# Altium PCB Flashing_Board_PcbDoc.PcbDoc
Units mm, origin at the board's own origin, x right, y up, seen from the top; angles counter-clockwise.
Board outline 72 x 31 mm, 2 copper layers (Top Layer, Bottom Layer); 24 components, 21 nets, 105 pads, 16 vias.
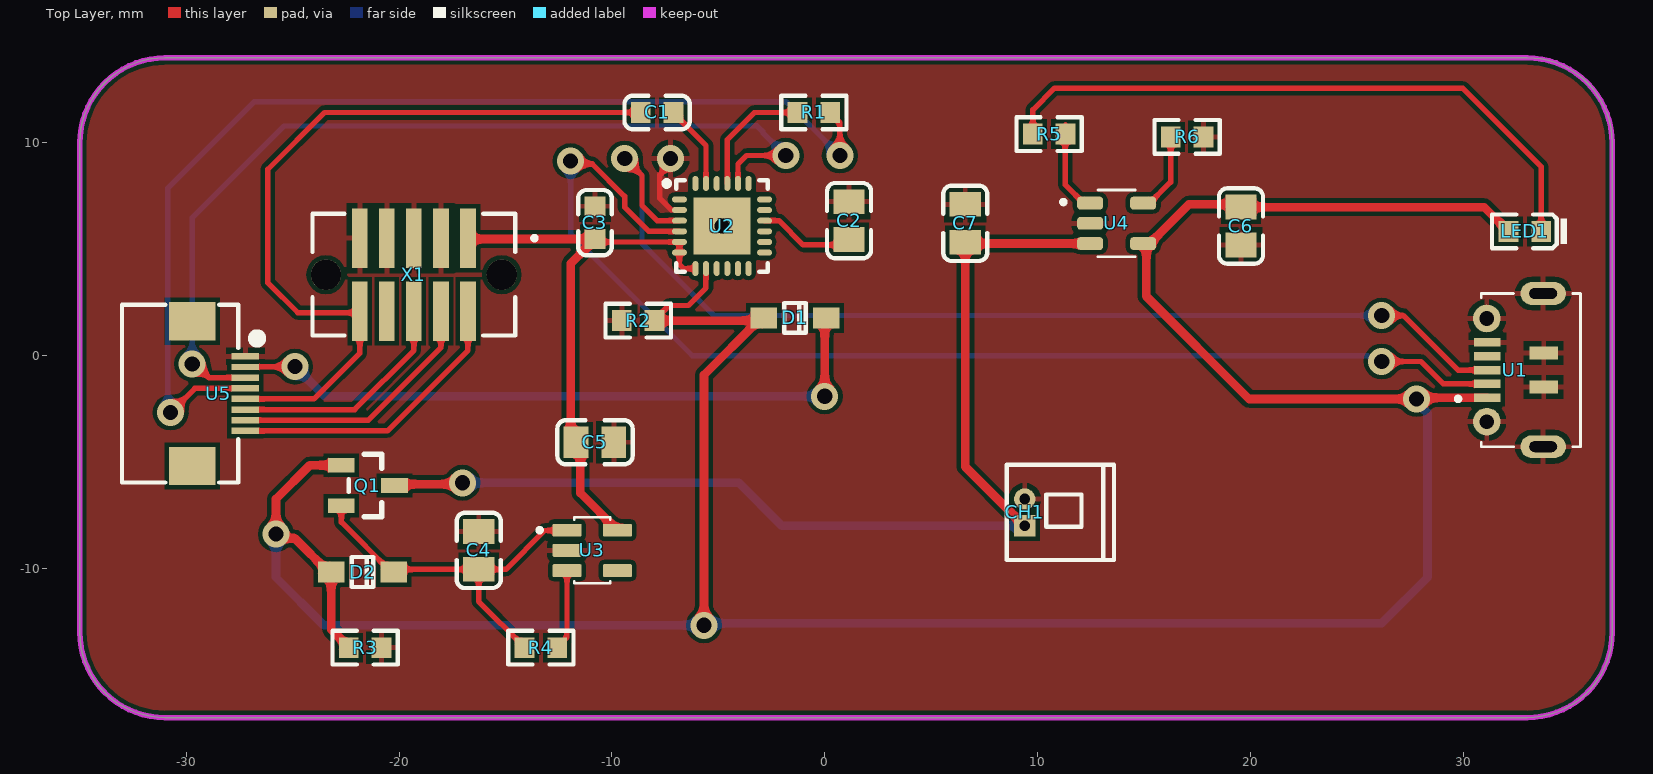
[diagram p0: Top Layer view]
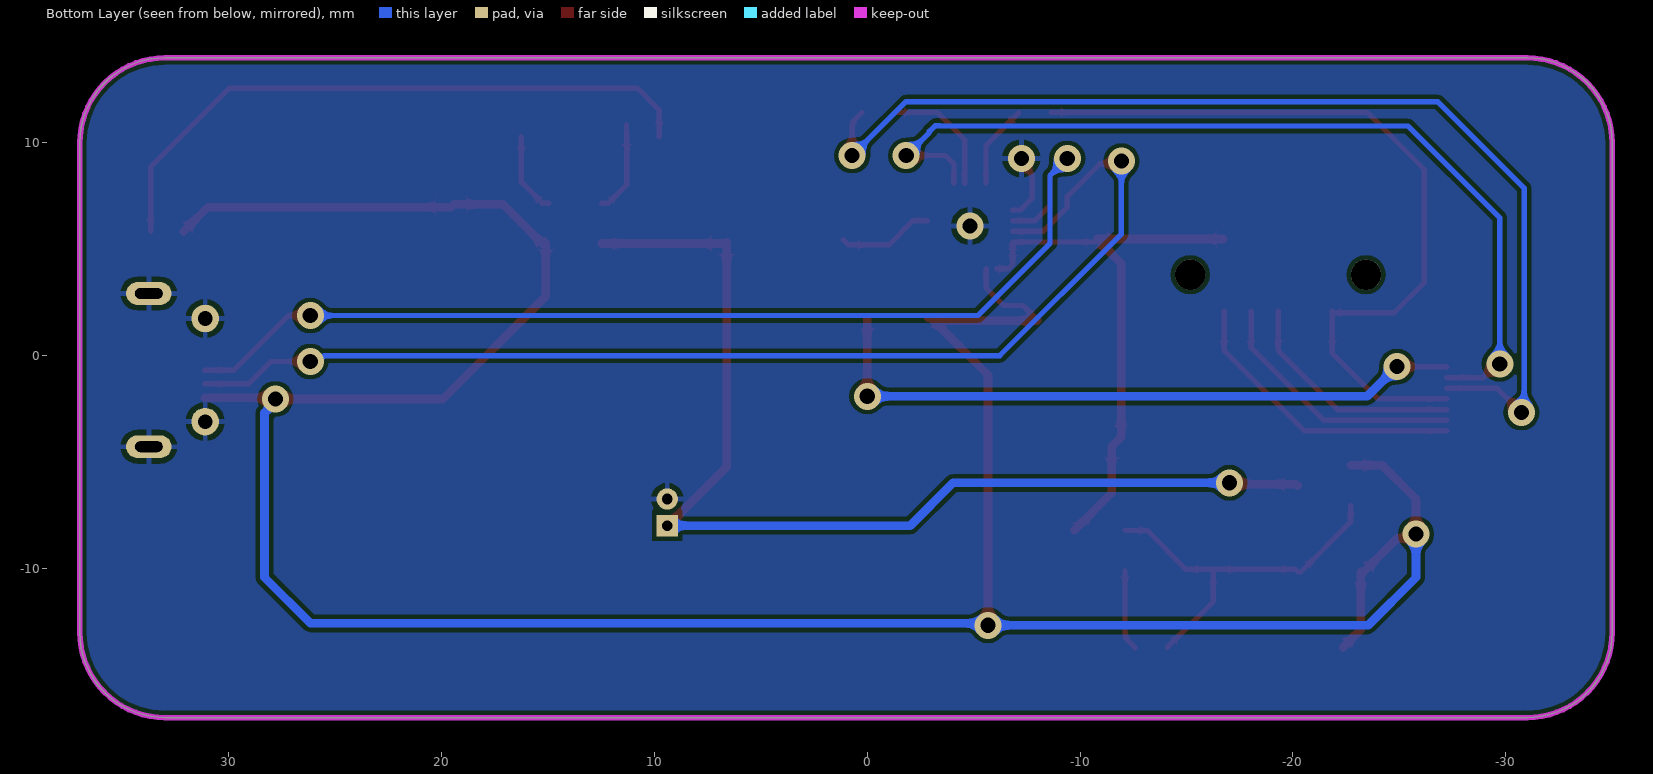
[diagram p1: Bottom Layer view, seen from below]
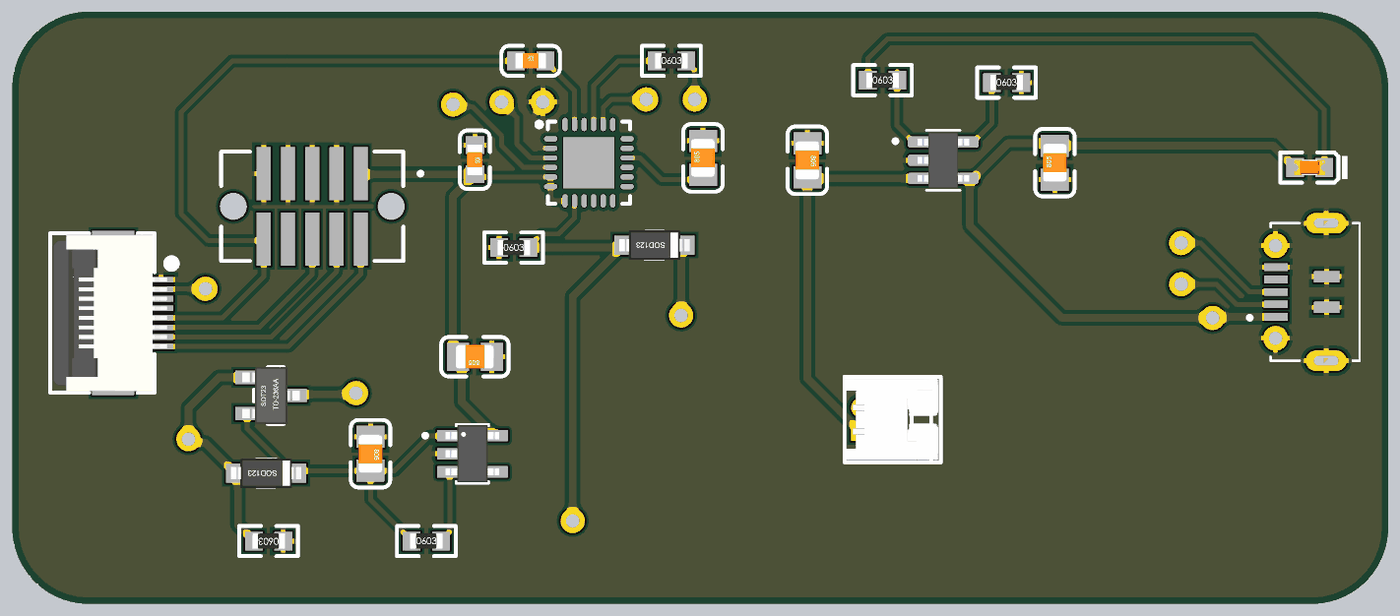
[diagram p2: 3D render of the assembled board from above, using the file's embedded part models]

## Layer stack, top to bottom
Top Solder: solder mask 0.0102, Solder Resist, Dk 3.5
Top Layer: signal copper 0.0356
Dielectric 1: dielectric 0.32, FR-4, Dk 4.8
Bottom Layer: signal copper 0.0356
Bottom Solder: solder mask 0.0102, Solder Resist, Dk 3.5

## Board outline
-35,-13 -35,10 cw(c-31,10) -31,14 33,14 cw(c33,10) 37,10 37,-13 cw(c33,-13) 33,-17 -31,-17 cw(c-31,-13)

## Design rules (kind name [scope] priority, off if disabled: settings)
Clearance [All] p1: gap=0.2 ignorepadtopadclearanceinfootprint=FALSE
ComponentClearance [All] p1: gap=0 collisioncheckmode=3 verticalgap=0 showdistances=FALSE
PolygonConnect [All] p1: connectstyle=Relief reliefconductorwidth=0.254 reliefentries=4 polygonreliefangle="90 Angle" airgapwidth=0.254
RoutingVias [All] p1: holewidth=0.711 width=1.27 viastyle="Through Hole" minholewidth=0 minwidth=0 maxholewidth=0.711 maxwidth=1.27
SolderMaskExpansion [All] p1: expansion=0.102 istentingtop=FALSE
Width [All] p1: maxlimit=0.406 minlimit=0.254 preferedwidth=0.254
29 further rules are at their usual default settings.

## Components (designator, comment, footprint, x,y, rotation, side; value= is the part's Value field where it differs from the comment)
C1 "0.1uF" 0603_C -7.874,11.43 r0 top
C2 "10uF" 0805_C 1.143,6.349 r90 top
C3 "0.1uF" 0603_C -10.795,6.253 r270 top
C4 "10uF" 0805_C -16.256,-9.144 r270 top
C5 "10uF" 0805_C -10.795,-4.064 r180 top
C6 "10uF" 0805_C 19.558,6.096 r90 top
C7 "10uF" 0805_C 6.604,6.223 r270 top
CH1 "BAT PIN" "BAT_MX 1.25-WI-2P" 9.398,-7.356 r90 top
D1 "LMBR120FT1G" SOD-123 -1.397,1.778 r180 top
D2 "LMBR120FT1G" SOD-123 -21.717,-10.16 r180 top
LED1 "ORANGE" 0603_LED_S1 32.893,5.842 r180 top
Q1 "SI2301CDS-T1-GE3" SOT-23(SOT-23-3) -21.463,-6.096 r180 top
R1 "1KΩ" 0603_R -0.508,11.43 r0 top
R2 "100KΩ" 0603_R -8.763,1.651 r0 top
R3 "100KΩ" 0603_R -21.59,-13.716 r180 top
R4 "100KΩ" 0603_R -13.335,-13.716 r0 top
R5 "1KΩ" 0603_R 10.541,10.414 r0 top
R6 "1KΩ" 0603_R 17.026,10.287 r0 top
U1 "MICROXNJ" SHOUHAN_MICROXNJ 32.444,-0.673 r270 top
U2 "CP2104-F03-GM" QFN-24_4x4x05P -4.826,6.096 r270 top
U3 "AP2112K-3.3TRG1" SOT95P285X140-5N -10.922,-9.144 r0 top
U4 "MCP73831T-2ATI/OT" SOT95P280X145-5N 13.716,6.223 r0 top
U5 "FPC_8PIN" "FPC0.5 2H-WS-8P" -29.718,-1.778 r270 top
X1 "4u20317" TFM-105-12-S-D-A -19.304,3.81 r180 top

## Footprints (in the part's own frame and the unit in brackets; to place one, negate y for a bottom-side part, rotate by r counter-clockwise, add the part's x,y. Pads: shape width x height; smd on the part's side, far side on the other; paste and mask are expansions set on the pad)
0603_C [mm]
  rect 0.93x0.98 smd: 1(-0.77,0) 2(0.77,0)
  silkscreen extent -1.53,-0.79 1.54,0.79, body extent -0.8,-0.4 0.8,0.4, height 0.3
0603_LED_S1 [mm]
  rect 0.93x0.98 smd: A(0.77,0) K(-0.77,0)
  silkscreen extent -1.98,-0.79 1.54,0.79, body extent -0.8,-0.4 0.8,0.4, height 0.6
0603_R [mm]
  rect 0.93x0.98 smd: 1(-0.77,0) 2(0.77,0)
  silkscreen extent -1.53,-0.79 1.54,0.79, body extent -0.85,-0.4 0.85,0.4, height 0.56
0805_C [mm]
  rect 1.16x1.47 smd: 1(-0.89,0) 2(0.89,0)
  silkscreen extent -1.77,-1.04 1.77,1.04, body extent -1,-0.62 1,0.63, height 0.77
"BAT_MX 1.25-WI-2P" [mm] "长：4.25mm，宽：1.8mm，高：3.3mm"
  rect 1x1 hole 0.5: 1(-0.625,0)
  round 1 hole 0.5: 2(0.625,0)
  silkscreen extent -2.24,-4.19 2.24,0.85, body extent -2.12,-4.05 2.13,0.85, height 3.35
"FPC0.5 2H-WS-8P" [mm] "长：8.2mm，宽：5.2mm，高：2mm 淘宝ID:黄晶宝石   店铺网址:https://shop463601444.taobao.com"
  rect 1.8x2.2 smd: 0(-3.4,0) 0(3.4,0)
  rect 0.3x1.3 smd: 1(-1.75,2.497) 2(-1.25,2.497) 3(-0.75,2.497) 4(-0.25,2.497) 5(0.25,2.497) 6(0.75,2.497) 7(1.25,2.497) 8(1.75,2.497)
  silkscreen extent -4.17,-3.3 4.17,3.23, body extent -4.1,-3.15 4.1,2.85, height 2
QFN-24_4x4x05P [mm]
  rect 2.68x2.68 smd mask+0.051: 0(0,0)
  oval 0.28x0.7 smd mask+0.051: 1(-1.25,-2) 2(-0.75,-2) 3(-0.25,-2) 4(0.25,-2) 5(0.75,-2) 6(1.25,-2) 13(1.25,2) 14(0.75,2) 15(0.25,2) 16(-0.25,2) 17(-0.75,2) 18(-1.25,2)
  oval 0.7x0.28 smd mask+0.051: 7(2,-1.25) 8(2,-0.75) 9(2,-0.25) 10(2,0.25) 11(2,0.75) 12(2,1.25) 19(-2,1.25) 20(-2,0.75) 21(-2,0.25) 22(-2,-0.25) 23(-2,-0.75) 24(-2,-1.25)
  silkscreen extent -2.15,-2.72 2.15,2.15
SHOUHAN_MICROXNJ [mm]
  rect 0.4x1.25 smd: 1(1.3,-1.312) 2(0.65,-1.312) 3(0,-1.312) 4(-0.65,-1.312) 5(-1.3,-1.312)
  rect 0.6x1.35 smd: S1(-0.8,1.338) S2(0.8,1.338)
  oval 1.07x2.14 hole 0.5 slot 1.3 at 90 deg: S3(-3.6,1.313) S6(3.6,1.313)
  round 1.3 hole 0.7: S4(-2.425,-1.337) S5(2.425,-1.337)
  silkscreen extent -3.6,-2.79 3.6,3.06
SOD-123 [mm]
  rect 1.25x1 smd: 1(1.475,0) 2(-1.475,0)
  silkscreen extent -0.5,-0.7 0.5,0.7, body extent -1.85,-0.77 1.85,0.78, height 1.35
SOT95P280X145-5N [mm]
  rrect50% 1.22x0.6 smd: 1(-1.245,0.95) 2(-1.245,0) 3(-1.245,-0.95) 4(1.245,-0.95) 5(1.245,0.95)
  silkscreen extent -2.6,-1.57 0.88,1.57, body extent -1.35,-1.45 1.35,1.45, height 1.45
SOT95P285X140-5N [mm]
  rrect15% 1.35x0.6 smd: 1(-1.185,0.95) 2(-1.185,0) 3(-1.185,-0.95) 4(1.185,-0.95) 5(1.185,0.95)
  silkscreen extent -2.57,-1.55 0.85,1.55, body extent -1.4,-1.5 1.4,1.5, height 1.4
SOT-23(SOT-23-3) [mm]
  rect 1.25x0.7 smd: 1(1.25,-0.95) 2(1.25,0.95) 3(-1.25,0)
  silkscreen extent -0.65,-1.46 0.9,1.46, body extent -1.5,-1.5 1.5,1.5, height 1.3
TFM-105-12-S-D-A [mm]
  rect 0.74x2.79 smd: 01(-2.54,-1.715) 02(-2.54,1.715) 03(-1.27,-1.715) 04(-1.27,1.715) 05(0,-1.715) 06(0,1.715) 07(1.27,-1.715) 08(1.27,1.715) 09(2.54,-1.715) 10(2.54,1.715)
  round 1.42 hole 1.42 unplated: ""(-4.13,0) ""(4.13,0)
  silkscreen extent -5.76,-2.86 4.76,2.86

## Part data
C1 C3: library part CAP_0.1uF, "capacitance"
C2 C4 C5 C6 C7: library part CAP_10uF, "capacitance", Package=0805, SuppliersPartNumber=C15850, ComponentLink1Description=供应商链接, ComponentLink1URL=http://www.szlcsc.com/product/details_16532.html, Supplier=LC
CH1: library part BAT, "button cell battary holder BS-08-B2AA025"
D1 D2: library part DIO_5, "schottky diode", Package=SOD-123, SuppliersPartNumber=C8598, ComponentLink1Description=供应商链接, ComponentLink1URL=http://www.szlcsc.com/product/details_9093.html, Supplier=LC
LED1: library part LED_ORANGE, "LED", Package=0603, SuppliersPartNumber=C2286, ComponentLink1Description=供应商链接, ComponentLink1URL=http://www.szlcsc.com/product/details_2659.html, Supplier=LC
Q1: library part MOS, "field effect tube", Package=SOT-23(SOT-23-3), SuppliersPartNumber=C10487, ComponentLink1Description=供应商链接, ComponentLink1URL=http://www.szlcsc.com/product/details_11030.html, Supplier=LC
R1 R5 R6: library part RES_1KΩ, "resistance", Package=0603, SuppliersPartNumber=C25819, ComponentLink1Description=供应商链接, ComponentLink1URL=http://www.szlcsc.com/product/details_26562.html, Supplier=LC
R2 R3 R4: library part RES_100KΩ, "resistance", Package=0603, SuppliersPartNumber=C25819, ComponentLink1Description=供应商链接, ComponentLink1URL=http://www.szlcsc.com/product/details_26562.html, Supplier=LC
U1: "Micro USB"
U2: library part CP2104, "USB chip", Package=QFN-24_4x4x05P, SuppliersPartNumber=C47742, ComponentLink1Description=供应商链接, ComponentLink1URL=http://www.szlcsc.com/product/details_48747.html, Supplier=LC
U3: library part AP2112K, "LDO_ low dropout linear regulator"
U4: library part MCP73831T, "Battery power management chip"
X1: library part JTAG-CORTEXBOXPOSTS, "Serial Wire (SW-DP) Connector"

## Via types
v1: diameter 1.27, hole 0.711, Top Layer to Bottom Layer, 16 vias

## Nets (pads, with @x,y where several pads share a name; then routed paths per layer and width w, separated by ;. In a path a pad name is that pad's centre, name@x,y a point inside that pad or via, vN(x,y) a via of type N, cw(c..) or ccw(c..) an arc to the next point about the centre after c; other vN are vias at no path point)
3V3: C3.2 C5.2 U2.5 U2.6 U2.7 U3.5 X1.01 | length 27
  Top Layer w0.254: X1.01 X1.01@-16.722,5.483 ; C3.2@-10.82,5.483 C3.2 ; C3.2@-10.808,5.47 -10.683,5.346 U2.5 U2.6 -6.826,4.286 -6.636,4.096 U2.7
  Top Layer w0.406: X1.01@-16.722,5.483 -10.82,5.483 -11.158,5.145 -11.158,5.12 -11.938,4.34 -11.938,-3.811 C5.2 -11.479,-4.27 -11.479,-6.452 U3.5
D+: U1.3 U2.3 | length 51.1
  Top Layer w0.254: v1(-9.398,9.271) -9.388,9.271 -8.585,8.468 -8.585,7.061 -7.875,6.351 -6.831,6.351 U2.3 ; v1(26.169,1.89) 27.193,1.89 29.756,-0.673 U1.3
  Bottom Layer w0.254: v1(-9.398,9.271) -9.388,9.271 -8.585,8.468 -8.585,5.283 -5.192,1.89 v1(26.169,1.89)
D-: U1.2 U2.4 | length 56.2
  Top Layer w0.254: v1(-11.938,9.144) -11.811,9.017 -10.922,9.017 -9.398,7.493 -9.398,6.985 -8.259,5.846 U2.4 ; v1(26.169,-0.269) 28.012,-0.269 29.066,-1.323 U1.2
  Bottom Layer w0.254: v1(-11.938,9.144) -11.938,5.715 -6.223,0 25.513,0 25.587,-0.074 25.975,-0.074 v1(26.169,-0.269)
GND: C2.2 C3.1 C4.1 C5.1 C6.1 C7.1 CH1.2 R2.1 R3.1 R6.2 U1.5 U1.S1 U1.S2 U1.S3 U1.S4 U1.S5 U1.S6 U2.0 U2.2 U3.2 U4.2 U5.1 X1.03 X1.05 X1.07 X1.09 | length 3.2
  Top Layer w0.254: v1(-7.239,9.271) -7.239,9.017 -7.747,8.509 -7.747,7.397 -7.201,6.851 -6.831,6.851 U2.2
  other v1: -4.826,6.096
NetC1_2: C1.2 U2.23 | length 4
  Top Layer w0.254: C1.2 -7.104,11.405 -5.576,9.877 U2.23
NetC2_1: C2.1 U2.16 | length 4.5
  Top Layer w0.254: U2.16 -2.155,6.346 -1.016,5.207 0.891,5.207 C2.1
NetC4_2: C4.2 D2.2 Q1.2 R4.1 U3.1 | length 17.7
  Top Layer w0.254: Q1.2 -22.713,-7.814 -20.367,-10.16 D2.2 -20.116,-10.034 C4.2 ; R4.1 -14.105,-13.691 -16.256,-11.54 C4.2 ; U3.1 -12.125,-8.212 -13.163,-8.212 -14.985,-10.034 C4.2
NetLED1_K: LED1.K R5.1 | length 30.1
  Top Layer w0.254: R5.1@9.779,10.293 9.779,11.557 10.795,12.573 29.972,12.573 33.663,8.882 LED1.K
NetR1_1: R1.1 U2.21 | length 5.9
  Top Layer w0.254: U2.21 -4.576,10.156 -3.302,11.43 R1.1
NetR4_2: R4.2 U3.3 | length 3.8
  Top Layer w0.254: R4.2 -12.565,-13.691 -12.107,-13.233 U3.3
NetR5_2: R5.2 U4.1 | length 4.4
  Top Layer w0.254: R5.2@11.297,10.414 11.297,8.037 12.161,7.173 U4.1 ; R5.2 R5.2@11.311,10.856
NetR6_1: R6.1 U4.5 | length 3.8
  Top Layer w0.254: U4.5 15.271,7.173 16.256,8.158 R6.1
RESET: C1.1 U5.5 X1.10 | length 37.1
  Top Layer w0.254: U5.5 -23.999,-2.028 -21.844,0.127 X1.10@-21.844,2.021 ; X1.10 -21.918,2.021 -24.754,2.021 -26.162,3.429 -26.162,8.763 -23.495,11.43 C1.1
RXD: R1.2 U5.4 | length 51.1
  Top Layer w0.254: v1(-30.734,-2.667) -29.595,-1.528 U5.4 ; R1.2 0.262,11.405 0.71,10.957 v1(0.71,9.408)
  Bottom Layer w0.254: v1(-30.734,-2.667) -30.861,-2.54 -30.861,7.874 -26.797,11.938 -1.82,11.938 v1(0.71,9.408)
SWDCLK: U5.7 X1.04 | length 12.3
  Top Layer w0.254: U5.7 -21.443,-3.028 -18.034,0.381 X1.04
SWDIO: U5.8 X1.02 | length 13.9
  Top Layer w0.254: U5.8 -20.546,-3.528 -16.764,0.254 X1.02
SWO: U5.6 X1.06 | length 10.9
  Top Layer w0.254: U5.6 -22.086,-2.528 -19.304,0.254 X1.06
TXD: U2.20 U5.3 | length 43.6
  Top Layer w0.254: v1(-29.718,-0.381) -29.575,-0.381 -28.928,-1.028 U5.3 ; U2.20@-4.071,8.408 -4.071,8.101 U2.20 -4.076,9.005 -3.673,9.408 v1(-1.83,9.408)
  Bottom Layer w0.254: v1(-29.718,-0.381) -29.718,6.477 -25.4,10.795 -3.429,10.795 -3.407,10.817 -3.197,10.817 -2.921,10.541 -2.921,10.499 v1(-1.83,9.408)
VBAT: C7.2 CH1.1 Q1.3 U4.3 | length 50.9
  Top Layer w0.406: Q1.3 -20.149,-6.032 -17.081,-6.032 v1(-17.018,-5.969) ; CH1.1 9.051,-7.634 9.024,-7.634 6.604,-5.214 C7.2 6.664,5.273 U4.3
  Bottom Layer w0.406: v1(-17.018,-5.969) -4.033,-5.969 -2.021,-7.981 CH1.1
VBUS: C6.2 D1.1 D2.1 LED1.A Q1.1 R2.2 R3.2 U1.1 U2.8 U4.4 | length 142.9
  Top Layer w0.254: R2.2 -7.993,1.676 -7.305,2.364 -6.399,2.364 -5.581,3.182 -5.581,4.091 U2.8
  Top Layer w0.406: Q1.1 -24.196,-5.146 -25.781,-6.731 v1(-25.781,-8.382) -25.587,-8.576 -24.901,-8.576 -23.317,-10.16 D2.1 -23.192,-12.859 -22.36,-13.691 R3.2 ; R2.2 D1.1@-3.124,1.651 ; v1(-5.673,-12.663) -5.673,-0.898 D1.1@-3.124,1.651 ; D1.1 -2.997,1.778 D1.1@-3.124,1.651 ; U1.1 27.872,-1.973 v1(27.813,-2.032) 19.939,-2.032 15.113,2.794 15.113,5.27 15.116,5.273 15.271,5.273 17.11,7.112 18.845,7.112 19.432,7.112 C6.2 30.979,6.986 LED1.A
  Bottom Layer w0.406: v1@-25.781,-8.001 v1(-25.781,-8.382) -25.781,-10.414 -23.532,-12.663 v1(-5.673,-12.663) ; v1@-5.673,-12.573 26.162,-12.573 28.321,-10.414 28.321,-2.689 27.813,-2.181 v1(27.813,-2.032)
VBUSIN: D1.2 U5.2 | length 31.5
  Top Layer w0.254: U5.2 -27.211,-0.518 -24.902,-0.518 v1(-24.892,-0.508) ; D1.2@0,1.7 D1.2
  Top Layer w0.406: v1(0,-1.905) D1.2@0,1.7
  Bottom Layer w0.406: v1(-24.892,-0.508) -23.495,-1.905 v1(0,-1.905)
pads on no net: U1.4 U2.1 U2.9 U2.10 U2.11 U2.12 U2.13 U2.14 U2.15 U2.17 U2.18 U2.19 U2.22 U2.24 U3.4 U5.0 X1. X1.08

## Polygon pours and split planes (outlines as drawn)
GND on Top Layer "GND_L01_P008" (solid, remove dead copper, pour order 8): -35,-13 -35,10 cw(c-31,10) -31,14 33,14 cw(c33,10) 37,10 37,-13 cw(c33,-13) 33,-17 -31,-17 cw(c-31,-13)
GND on Bottom Layer "GND_L02_P009" (solid, remove dead copper, pour order 9): -35,-13 -35,10 cw(c-31,10) -31,14 33,14 cw(c33,10) 37,10 37,-13 cw(c33,-13) 33,-17 -31,-17 cw(c-31,-13)

## Keep-outs
Keep-Out Layer:
  the board outline again, w0.254

## Text inside footprints (layer, text, board x,y; h text height)
U1: Mechanical 13 "PCB EDGE" at 35.873,-5.753 h0.61 r270